# Altium PCB BatteryBoard.PcbDoc
Units mil, origin at the board's own origin, x right, y up, seen from the top; angles counter-clockwise.
Board outline 11220.47 x 6496.06 mil, 2 copper layers (Top Layer, Bottom Layer); 131 components, 81 nets, 466 pads, 32 vias.
Unrouted connection lines stored in the file: 96.
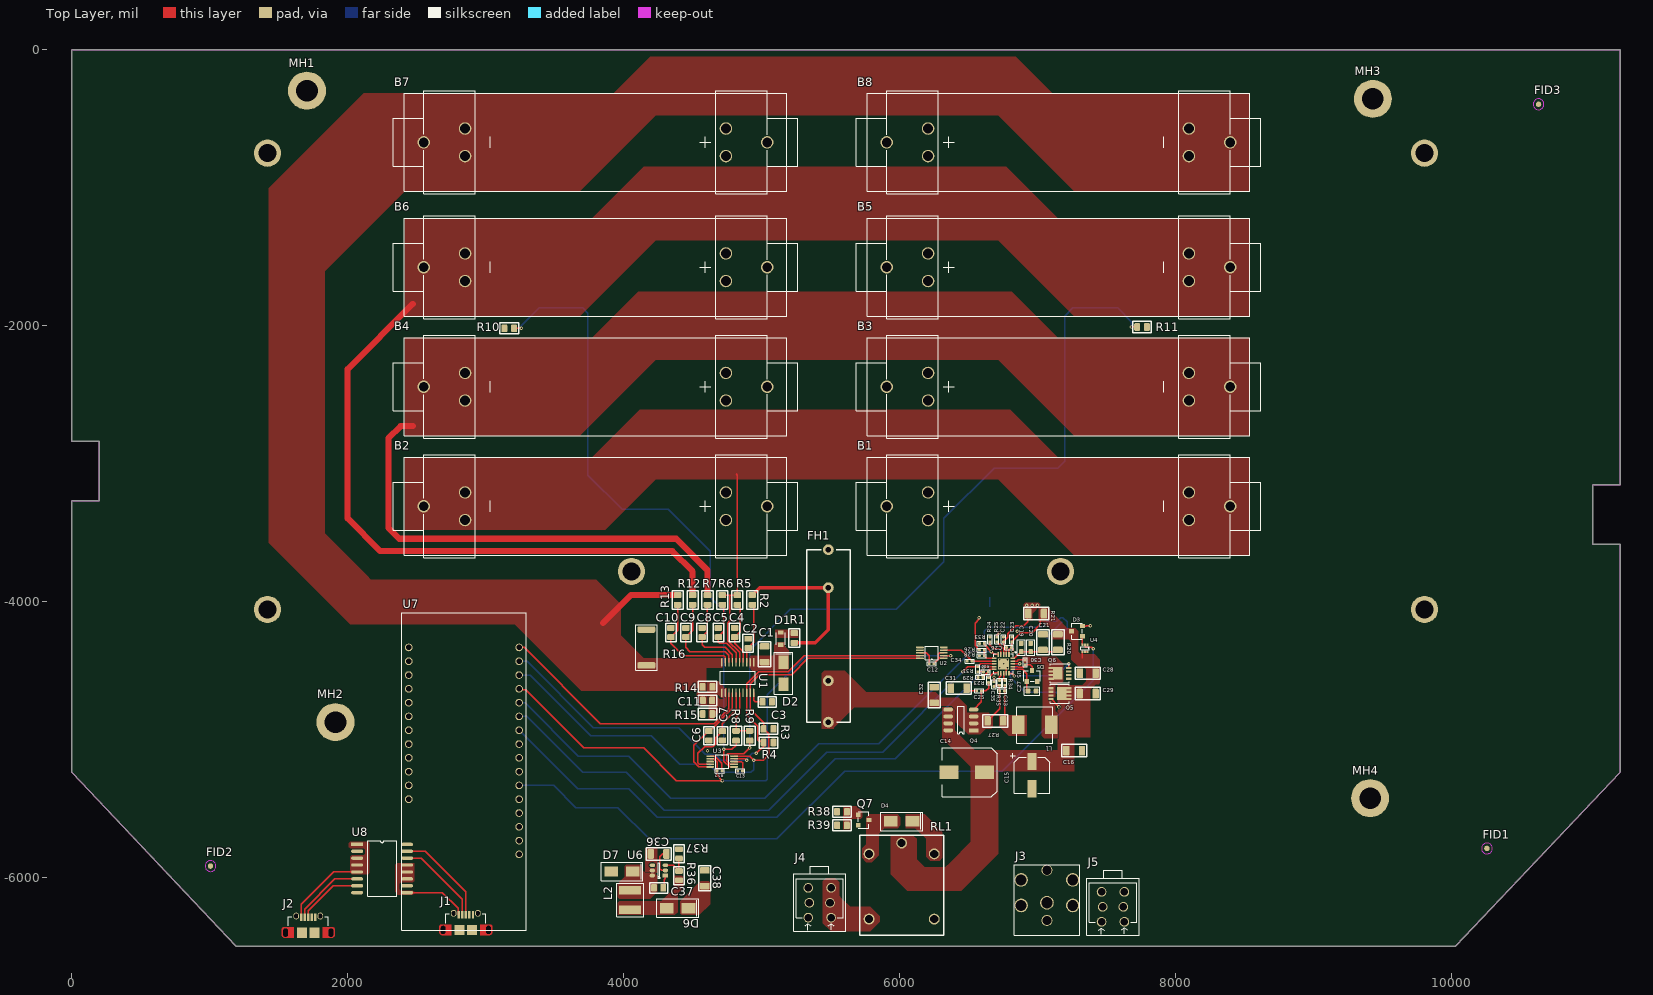
[diagram p0: Top Layer view]
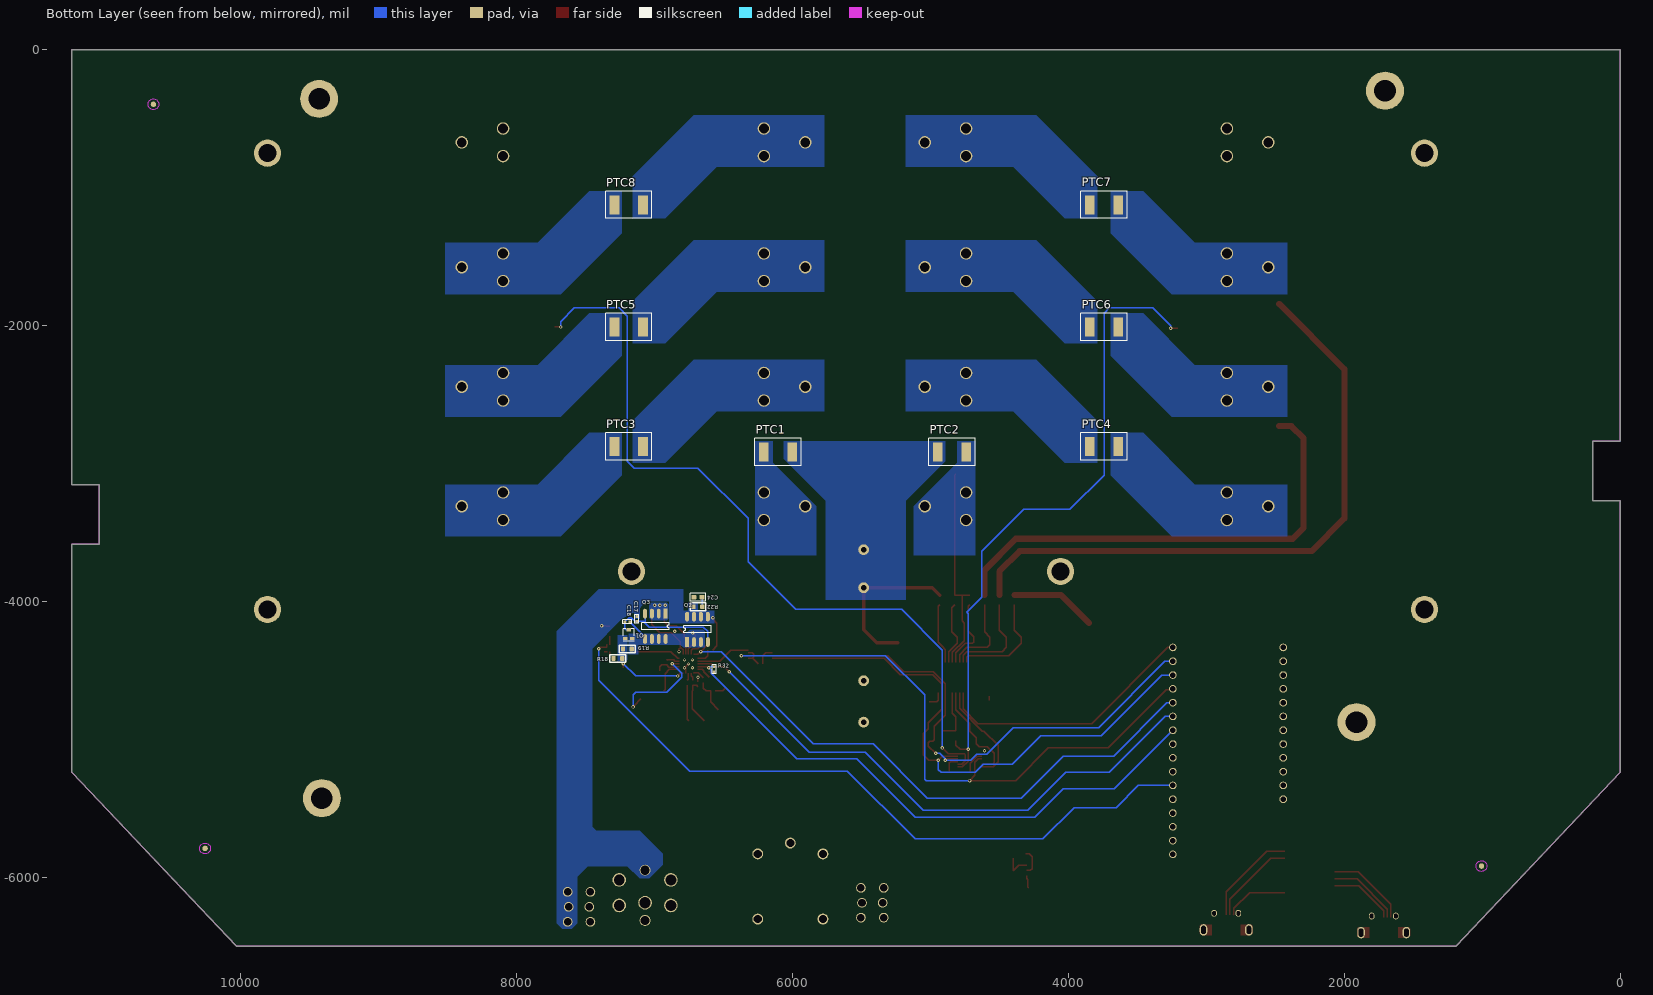
[diagram p1: Bottom Layer view, seen from below]
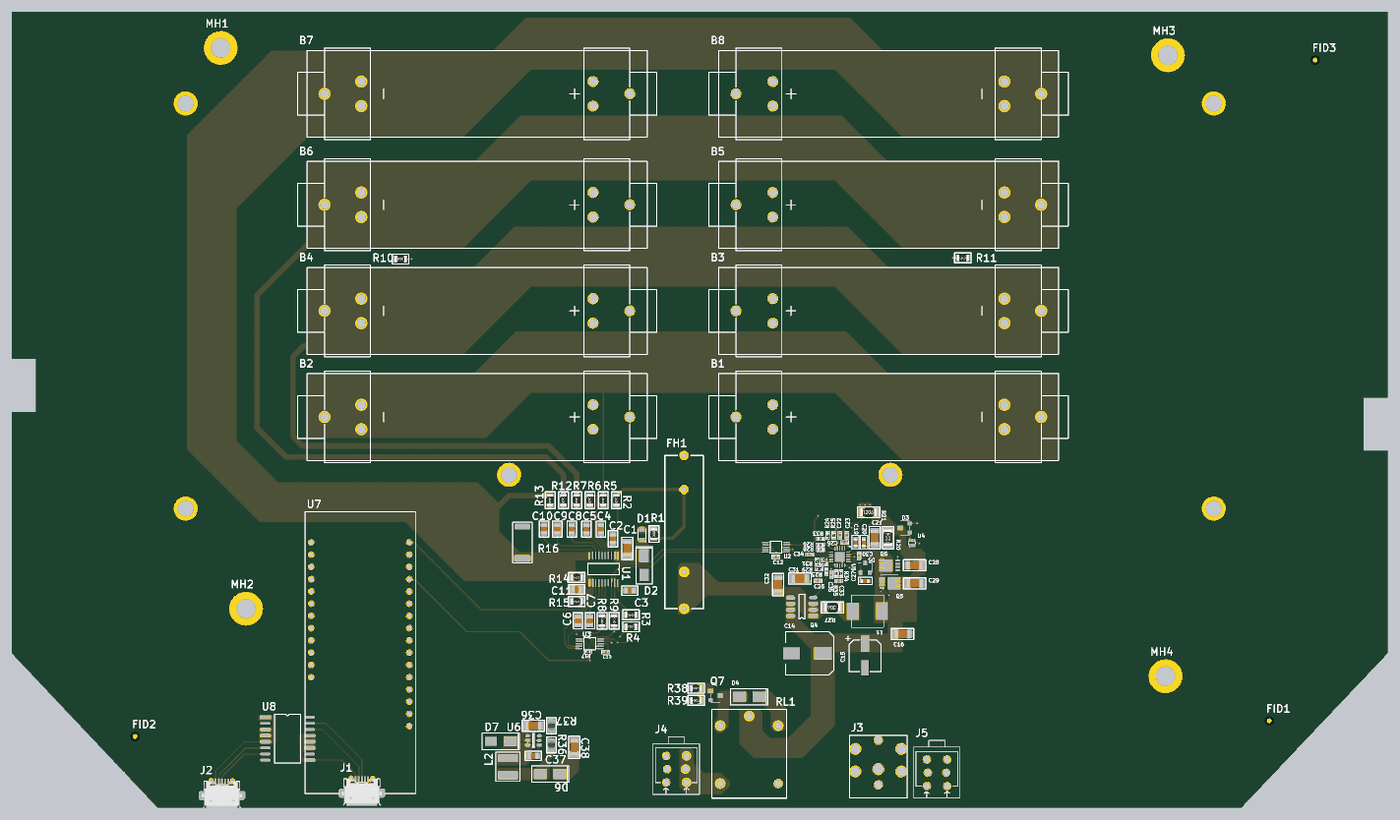
[diagram p2: 3D render of the assembled board from above, using the file's embedded part models]

## Layer stack, top to bottom
Top Solder: solder mask 0.4, Solder Resist, Dk 3.5
Top Layer: signal copper 1.4
Dielectric 1: dielectric 12.6, FR-4, Dk 4.8
Bottom Layer: signal copper 1.4
Bottom Solder: solder mask 0.4, Solder Resist, Dk 3.5

## Board outline
0,-5236.22 0,-3267.72 196.85,-3267.72 196.85,-2834.65 0,-2834.65 0,0 11220.47,0 11220.47,-3149.61 11023.62,-3149.61 11023.62,-3582.68 11220.47,-3582.68 11220.47,-5236.22 10027.56,-6496.06 1188.98,-6496.06

## Design rules (kind name [scope] priority, off if disabled: settings)
Clearance [All] p1: gap=6
ComponentClearance [All] p1: gap=0 collisioncheckmode=3 verticalgap=10 showdistances=FALSE
HoleToHoleClearance [All] p1: gap=3.94 allowstackedmicrovias=TRUE
MinimumSolderMaskSliver [All] p1: minsoldermaskwidth=0
PlaneConnect [All] p1: planeconnectstyle=Direct reliefexpansion=20 reliefentries=4 reliefconductorwidth=10 reliefairgap=10
PolygonConnect [All] p1: connectstyle=Direct reliefconductorwidth=10 reliefentries=4 polygonreliefangle="90 Angle" airgapwidth=10
RoutingVias [All] p1: holewidth=28 width=50 viastyle="Through Hole" minholewidth=11.81 minwidth=5.91 maxholewidth=248.03 maxwidth=50
SilkToSilkClearance [All] p1: silktosilkclearance=0
SilkToSolderMaskClearance [IsPad] p1: minsilkscreentomaskgap=0 clearancetoexposedcopper=TRUE
SolderMaskExpansion [All] p1: expansion=4
UnRoutedNet [All] p1 off:
Width [All] p1: maxlimit=50 minlimit=6 preferedwidth=10
23 further rules are at their usual default settings.

## Classes and differential pairs
component class Title: FID1 FID2 FID3 MH1 MH2 MH3 MH4
component class MC: J1 J2 J3 J4 J5 Q7 R38 R39 U7 U8
component class DC_DC_5V: C36 C37 C38 D6 D7 L2 R36 R37 U6
component class BatteryCharger: C14 C15 C16 C17 C18 C19 C20 C21 C22 C23 C24 C25 C26 C27 C28 C29 C30 C31 C32 C33 C34 C35 D3 D4 D5 L1 Q1 Q2 Q3 Q4 Q5 Q6 R18 R19 R20 R21 R22 R23 R24 R25 R26 R27 R28 R29 R30 R31 R32 R33 R34 R35 RL1 U4 U5
component class ADC: C12 C13 R17 U2 U3
component class "Battery Front End": B1 B2 B3 B4 B5 B6 B7 B8 C1 C2 C3 C4 C5 C6 C7 C8 C9 C10 C11 D1 D2 FH1 PTC1 PTC2 PTC3 PTC4 PTC5 PTC6 PTC7 PTC8 R1 R2 R3 R4 R5 R6 R7 R8 R9 R10 R11 R12 R13 R14 R15 R16 U1

## Components (designator, comment, footprint, x,y, rotation, side; value= is the part's Value field where it differs from the comment)
B1 "Battery Cell 18650" "18650 PC PIN" 5905.51,-3307.09 r0 top
B2 "Battery Cell 18650" "18650 PC PIN" 5039.37,-3307.09 r180 top
B3 "Battery Cell 18650" "18650 PC PIN" 5905.51,-2440.94 r0 top
B4 "Battery Cell 18650" "18650 PC PIN" 5039.37,-2440.94 r180 top
B5 "Battery Cell 18650" "18650 PC PIN" 5905.51,-1574.8 r0 top
B6 "Battery Cell 18650" "18650 PC PIN" 5039.37,-1574.8 r180 top
B7 "Battery Cell 18650" "18650 PC PIN" 5039.37,-669.29 r180 top
B8 "Battery Cell 18650" "18650 PC PIN" 5905.51,-669.29 r0 top
C1 "CAP - 1206" CAP_1206 5019.68,-4379.92 r90 top
C2 "CAP - 0805" CAP_0805 4901.57,-4301.18 r90 top
C3 "CAP - 0805" CAP_0805 5039.37,-4724.41 r0 top
C4 "CAP - 0805" CAP_0805 4803.15,-4222.44 r90 top
C5 "CAP - 0805" CAP_0805 4685.04,-4222.44 r90 top
C6 "CAP - 0805" CAP_0805 4616.14,-4970.47 r270 top
C7 "CAP - 0805" CAP_0805 4714.57,-4970.47 r270 top
C8 "CAP - 0805" CAP_0805 4566.93,-4222.44 r90 top
C9 "CAP - 0805" CAP_0805 4448.82,-4222.44 r90 top
C10 "CAP - 0805" CAP_0805 4340.55,-4222.44 r90 top
C11 "CAP - 0805" CAP_0805 4606.3,-4714.57 r0 top
C12 "CAP - 0402" CAP_0402 6230.31,-4448.82 r0 top
C13 "CAP - 0402" CAP_0402 4842.52,-5226.38 r180 top
C14 "CAP ALU - 6.3mm" "CAP UWT 8x10" 6486.22,-5236.22 r180 top
C15 "CAP ALU - 6.3mm" "CAP ALU - 6.3mm DIA" 6958.66,-5255.91 r90 top
C16 "CAP - 1206" CAP_1206 7263.78,-5078.74 r0 top
C17 "CAP - 0402" CAP_0402 7126.28,-4124.41 r90 bottom
C18 "CAP - 0402" CAP_0402 7195.18,-4144.09 r180 bottom
C19 "CAP - 0603" CAP_0603 6880.22,-4331.1 r90 top
C20 "CAP - 0603" CAP_0603 6949.11,-4331.1 r90 top
C21 "CAP - 1206" CAP_1206 7037.7,-4291.73 r90 top
C22 "CAP - 0402" CAP_0402 6752.26,-4272.05 r270 top
C23 "CAP - 0402" CAP_0402 6811.32,-4272.05 r270 top
C24 "CAP - 0603" CAP_0603 6683.07,-3966.54 r0 bottom
C25 "CAP - 0402" CAP_0402 6574.8,-4645.67 r180 top
C26 "CAP - 0402" CAP_0402 6791.63,-4331.1 r180 top
C27 "CAP - 0603" CAP_0603 6958.96,-4646.06 r0 top
C28 "CAP - 1206" CAP_1206 7362.2,-4517.72 r180 top
C29 "CAP - 1206" CAP_1206 7362.2,-4665.35 r0 top
C30 "CAP - 0402" CAP_0402 6909.74,-4439.37 r90 top
C31 "CAP - 1206" CAP_1206 6427.17,-4625.98 r180 top
C32 "CAP - 1206" CAP_1206 6250,-4675.2 r90 top
C33 "CAP - 0402" CAP_0402 6742.42,-4646.06 r0 top
C34 "CAP - 0402" CAP_0402 6506.2,-4429.53 r180 top
C35 "CAP - 0402" CAP_0402 6683.07,-4596.46 r270 top
C36 "CAP - 1206" CAP_1206 4251.97,-5826.77 r0 top
C37 "CAP - 0805" CAP_0805 4251.97,-6072.83 r180 top
C38 "CAP - 1206" CAP_1206 4586.61,-6003.94 r90 top
D1 "SCHOTTKEY" SOD-323 5137.8,-4222.44 r270 top
D2 "DIODE ZENER" DO-214AC_SOD128 5157.48,-4517.72 r270 top
D3 "BAT54C" BAT54C 7323.13,-4212.99 r90 top
D4 "SCHOTTKEY" DO-214AC_SOD128 6013.78,-5590.55 r180 top
D5 "DIODE BAT54" BAT54 6958.96,-4577.17 r0 top
D6 "SCHOTTKEY" DO-214AC_SOD128 4389.76,-6220.47 r180 top
D7 "SCHOTTKEY" DO-214AC_SOD128 3986.22,-5954.72 r180 top
FH1 "FH 3AB-3AG" FH_3AB_3AG 5482.28,-3622.05 r270 top
FID1 "Fiducial 1mm" FID_1MM 10255.91,-5787.4 r90 top
FID2 "Fiducial 1mm" FID_1MM 1003.94,-5915.35 r90 top
FID3 "Fiducial 1mm" FID_1MM 10629.92,-393.7 r90 top
J1 "629105150921" 629105150921 2854.33,-6377.95 r0 top
J2 "629105150921" 629105150921 1712.6,-6397.64 r0 top
J3 "Barrel 5.5x2.5mm" "Barrel 5.5mm 2.5mm" 7066.93,-6417.32 r90 top
J4 "MOLEX 4 POS - TERMINAL BLOCK 2 POS" MOLEX4POS_TERMBLOCK2POS 5501.97,-6289.37 r180 top
J5 "MOLEX 4 POS - TERMINAL BLOCK 2 POS" MOLEX4POS_TERMBLOCK2POS 7627.95,-6318.9 r180 top
L1 "IND" ASPI-0630LR 6978.35,-4891.73 r180 top
L2 "IND" NR5040T150M 4045.28,-6161.42 r270 top
MH1 "Mounting Hole 6/32" MH_ENG_6-32 1702.76,-295.28 r0 top
MH2 "Mounting Hole 6/32" MH_ENG_6-32 1909.45,-4872.05 r0 top
MH3 "Mounting Hole 6/32" MH_ENG_6-32 9429.13,-354.33 r0 top
MH4 "Mounting Hole 6/32" MH_ENG_6-32 9409.45,-5423.23 r0 top
PTC1 "PTC - 1812" "PTC - 1812" 6102.36,-2913.39 r0 bottom
PTC2 "PTC - 1812" "PTC - 1812" 4842.52,-2913.39 r180 bottom
PTC3 "PTC - 1812" "PTC - 1812" 7185.04,-2874.02 r180 bottom
PTC4 "PTC - 1812" "PTC - 1812" 3740.16,-2874.02 r0 bottom
PTC5 "PTC - 1812" "PTC - 1812" 7185.04,-2007.87 r180 bottom
PTC6 "PTC - 1812" "PTC - 1812" 3740.16,-2007.87 r0 bottom
PTC7 "PTC - 1812" "PTC - 1812" 3740.16,-1122.05 r0 bottom
PTC8 "PTC - 1812" "PTC - 1812" 7185.04,-1122.05 r180 bottom
Q1 "MOSFET-N" PG-SOT-323 7185.33,-4203.15 r180 bottom
Q2 "MOSFET-N" "SO-8 FDS6680AS" 6761.81,-4291.34 r90 bottom
Q3 "MOSFET-N" "SO-8 FDS6680AS" 6917.22,-4085.04 r270 bottom
Q4 "MOSFET-N" "SO-8 FDS6680AS" 6535.43,-4931.1 r180 top
Q5 "MOSFET-N" SiS412DN 7096.46,-4625.98 r0 top
Q6 "MOSFET-N" SiS412DN 7224.41,-4557.09 r180 top
Q7 "NMOS" SOT-23 5698.82,-5580.71 r270 top
R1 "RES - 0805" RES_0805 5236.22,-4261.81 r90 top
R2 "RES - 0805" RES_0805 4931.1,-3986.22 r270 top
R3 "RES - 0805" RES_0805 5049.21,-4921.26 r0 top
R4 "RES - 0805" RES_0805 5049.21,-5019.68 r0 top
R5 "RES - 0805" RES_0805 4822.83,-3986.22 r270 top
R6 "RES - 0805" RES_0805 4714.57,-3986.22 r270 top
R7 "RES - 0805" RES_0805 4606.3,-3986.22 r270 top
R8 "RES - 0805" RES_0805 4812.99,-4970.47 r90 top
R9 "RES - 0805" RES_0805 4911.42,-4970.47 r90 top
R10 "TH - 0805" RES_0805 3169.29,-2017.72 r180 top
R11 "TH - 0805" RES_0805 7755.91,-2007.87 r0 top
R12 "RES - 0805" RES_0805 4498.03,-3986.22 r270 top
R13 "RES - 0805" RES_0805 4389.76,-3986.22 r270 top
R14 "RES - 0805" RES_0805 4606.3,-4616.14 r0 top
R15 "RES - 0805" RES_0805 4606.3,-4812.99 r0 top
R16 "RES - 2512" RES_2512 4163.39,-4330.71 r90 top
R17 "RES - 0402" RES_0402 4694.88,-5226.38 r180 top
R18 "RES - 0603" RES_0603 7264.07,-4409.84 r180 bottom
R19 "RES - 0603" RES_0603 7195.18,-4340.94 r180 bottom
R20 "RES - 1206" RES_1206 7145.96,-4291.73 r90 top
R21 "RES - 1206" RES_1206 6988.19,-4084.65 r0 top
R22 "RES - 0603" RES_0603 6683.37,-4035.83 r180 bottom
R23 "RES - 0402" RES_0402 6644,-4567.32 r270 top
R24 "RES - 0402" RES_0402 6653.84,-4272.05 r270 top
R25 "RES - 0402" RES_0402 6703.05,-4272.05 r270 top
R26 "RES - 0402" RES_0402 6594.78,-4350.79 r0 top
R27 "RES - 1206" RES_1206 6692.91,-4862.2 r180 top
R28 "RES - 0402" RES_0402 6594.78,-4390.16 r180 top
R29 "RES - 0402" RES_0402 6584.94,-4547.64 r180 top
R30 "RES - 0402" RES_0402 6624.31,-4508.27 r180 top
R31 "RES - 0402" RES_0402 6565.26,-4488.58 r90 top
R32 "RES - 0402" RES_0402 6565.26,-4488.58 r90 bottom
R33 "RES - 0402" RES_0402 6594.78,-4301.57 r0 top
R34 "RES - 0402" RES_0402 6762.11,-4587.01 r270 top
R35 "RES - 0402" RES_0402 6722.74,-4587.01 r270 top
R36 "RES - 0805" FER_0805 4399.61,-5984.25 r90 top
R37 "RES - 0805" FER_0805 4399.61,-5826.77 r90 top
R38 "RES - 0805" RES_0805 5580.71,-5521.65 r0 top
R39 "RES - 0805" RES_0805 5580.71,-5620.08 r0 top
RL1 "Relay SPDT" ORWH-SH 5777.56,-5826.77 r270 top
U1 "BQ76925PWR" BQ76925 4940.94,-4438.98 r270 top
U2 "ADS1015" ADS1015 6318.9,-4409.45 r180 top
U3 "ADS1015" ADS1015 4625.98,-5118.11 r0 top
U4 "IMD2A" IMD2A 7362.2,-4311.02 r270 top
U5 "BQ24725A" bq24725A 6752.26,-4449.21 r270 top
U6 "RT8258" SOT23-6 4301.18,-5984.25 r180 top
U7 "ESP32" "ESP32 V1" 2440.94,-4330.71 r0 top
U8 "ADUM3160" SOIC16 2066.93,-5757.87 r0 top

## Footprints (in the part's own frame and the unit in brackets; to place one, negate y for a bottom-side part, rotate by r counter-clockwise, add the part's x,y. Pads: shape width x height; smd on the part's side, far side on the other; paste and mask are expansions set on the pad)
"18650 PC PIN" [mm]
  round 2.3 hole 1.83: 1(0,0) 1(7.62,-2.54) 1(7.62,2.54) 2(55.62,-2.54) 2(55.62,2.54) 2(63.24,0)
  silkscreen extent -5.6,-9.5 68.84,9.5
629105150921 [mm] "Micro USB 2.0 Type AB Horizontal"
  rect 0.4x1.35 smd: 1(-1.3,2.805) 2(-0.65,2.805) 3(0,2.805) 4(0.65,2.805) 5(1.3,2.805)
  round 0 / inner oval 1.4x2.1 / far side oval 1.4x2.1 hole 0.825 slot 1.5 at 90 deg: Shell(-4.175,0)
  oval 1.05x1.25 hole 0.65 slot 0.85 at 90 deg: Shell(-2.225,3.055) Shell(2.225,3.055)
  rect 1.8x1.9 smd: Shell(-1.15,0) Shell(1.15,0)
  round 0 / inner round 0 / far side oval 1.4x2.1 hole 0.825 slot 1.5 at 90 deg: Shell(4.175,0)
  Top Layer region: 4.353,-0.95 4.544,-0.912 4.706,-0.804 4.814,-0.641 4.852,-0.45 4.852,-0.45 4.852,0.65 4.83,0.765 4.765,0.862 4.667,0.927 4.553,0.95 4.553,0.95 2.668,0.95 2.668,-0.95
  Top Layer region: -4.353,-0.95 -4.544,-0.912 -4.706,-0.804 -4.814,-0.641 -4.852,-0.45 -4.852,-0.45 -4.852,0.65 -4.83,0.765 -4.765,0.862 -4.667,0.927 -4.553,0.95 -4.553,0.95 -2.668,0.95 -2.668,-0.95
  silkscreen extent -3.7,1.25 3.7,2.97, body extent -4.3,-2.64 4.3,3.23, height 2.76
ADS1015 [mm]
  rect 1.45x0.3 smd: 1(0,0)
  oval 1.45x0.3 smd: 2(0,-0.5) 3(0,-1) 4(0,-1.5) 5(0,-2) 6(4.4,-2) 7(4.4,-1.5) 8(4.4,-1) 9(4.4,-0.5) 10(4.4,0)
  silkscreen extent 1,-2.25 3.4,0.25
ASPI-0630LR [mm]
  rect 2.35x3.4 smd: 1(-3.025,0) 2(3.025,0)
  silkscreen extent -3.35,-3.35 3.35,3.35
"Barrel 5.5mm 2.5mm" [mm]
  round 2 hole 1.7: 1(12,0) 3(2.75,0)
  round 2.5 hole 2.1: 2(6,0)
  round 2.5 hole 2: 3(5.5,-4.75) 3(5.5,4.75) 3(10.2,-4.75) 3(10.2,4.75)
  silkscreen extent 0,-6 13,6
BAT54 [mm]
  rect 0.8x0.9 smd: 1(-0.95,0) 2(0.95,0) 3(0,2)
  silkscreen extent -1.5,0 1.5,1.97
BAT54C [mm]
  rect 0.8x0.9 smd: 1(0.95,0) 2(-0.95,0) 3(0,2)
  silkscreen extent -1.5,0 1.5,1.97
bq24725A [mm]
  rect 2.05x2.05 smd: 0(0,0)
  rect 0.85x0.28 smd: 1(-1.725,1) 2(-1.725,0.5) 3(-1.725,0) 4(-1.725,-0.5) 5(-1.725,-1) 11(1.725,-1) 12(1.725,-0.5) 13(1.725,0) 14(1.725,0.5) 15(1.725,1)
  rect 0.28x0.85 smd: 6(-1,-1.725) 7(-0.5,-1.725) 8(0,-1.725) 9(0.5,-1.725) 10(1,-1.725) 16(1,1.725) 17(0.5,1.725) 18(0,1.725) 19(-0.5,1.725) 20(-1,1.725)
  silkscreen extent -2.18,-1.83 1.83,2.23
BQ76925 [mm]
  rect 1.55x0.25 smd: 1(0,0)
  oval 1.55x0.25 smd: 2(0,-0.65) 3(0,-1.3) 4(0,-1.95) 5(0,-2.6) 6(0,-3.25) 7(0,-3.9) 8(0,-4.55) 9(0,-5.2) 10(0,-5.85) 11(5.6,-5.85) 12(5.6,-5.2) 13(5.6,-4.55) 14(5.6,-3.9) 15(5.6,-3.25) 16(5.6,-2.6) 17(5.6,-1.95) 18(5.6,-1.3) 19(5.6,-0.65) 20(5.6,0)
  silkscreen extent 1.61,-6.18 3.99,0.33
"CAP ALU - 6.3mm DIA" [mm]
  rect 3.2x1.6 smd: 1(2.5,0) 2(-2.5,0)
  silkscreen extent -3.3,-3.3 4.05,3.98
"CAP UWT 8x10" [mm]
  rect 3.5x2.5 smd: 1(-3.25,0) 2(3.25,0)
  silkscreen extent -5.55,-4.5 4.5,4.5
CAP_0402 [mil]
  rrect60% 20x20 smd: 1(-17.5,0) 2(17.5,0)
  silkscreen extent -32,-15 32,15, body extent -19,-10 20,10, height 20
CAP_0603 [mil]
  rrect35% 35x34 smd: 1(-29.5,0) 2(29.5,0)
  silkscreen extent -56,-30 56,30, body extent -32,-16 31,16, height 35
CAP_0805 [mil]
  rrect37% 43x55 smd: 1(-33.5,0) 2(33.5,0)
  silkscreen extent -66,-38 66,38, body extent -39,-24 40,25, height 49
CAP_1206 [mil]
  rrect34% 47x71 smd: 1(-57,0) 2(57,0)
  silkscreen extent -91,-45 91,45, body extent -62,-31 64,32, height 49
DO-214AC_SOD128 [mm] "In between DO-214AC and SOD128 diode package for easy diode change"
  rect 2.5x1.9 smd: 1(2,0) 2(-2,0)
  silkscreen extent -3.85,-1.7 3.85,1.7
"ESP32 V1" [mil]
  round 55 hole 40: 1(0,0) 2(0,-100) 3(0,-200) 4(0,-300) 5(0,-400) 6(0,-500) 7(0,-600) 8(0,-700) 9(0,-800) 10(0,-900) 11(0,-1000) 12(0,-1100) 13(800,0) 14(800,-100) 15(800,-200) 16(800,-300) 17(800,-400) 18(800,-500) 19(800,-600) 20(800,-700) 21(800,-800) 22(800,-900) 23(800,-1000) 24(800,-1100) 25(800,-1200) 26(800,-1300) 27(800,-1400) 28(800,-1500)
  silkscreen extent -50,-2050 850,250
FER_0805 [mil]
  rrect37% 43x55 smd: 1(-33.5,0) 2(33.5,0)
  silkscreen extent -66,-38 66,38, body extent -40,-25 38,25, height 33
FH_3AB_3AG [mm]
  round 2 hole 1: 1(0,0) 1(7,0) 2(24.13,0) 2(31.75,0)
  silkscreen extent 0,-4 31.75,4
FID_1MM [mm] "Fiducial 1mm diameter - Exposed 2mm"
  round 1 all layers, no hole paste-1 mask+0.5: 0(0,0)
  Keep-Out Layer circle w0.127: c0,0 r1
IMD2A [mm]
  rect 0.45x0.37 smd: 1(0,0) 2(0,-0.5) 3(0,-1) 4(1.25,-1) 5(1.25,-0.5) 6(1.25,0)
  silkscreen extent 0.33,-1.25 0.92,0.25
MH_ENG_6-32 [mm] "Mounting hole - Imperial 6-32"
  round 7 hole 4: 1(0,0)
MOLEX4POS_TERMBLOCK2POS [mm]
  round 1.78 hole 1.4: 1(0,0) 2(4.2,0) 3(0,-5.5) 4(4.2,-5.5) 5(0.195,-2.75) 6(4,-2.75)
  silkscreen extent -2.7,-9.45 6.9,2.5
NR5040T150M [mm]
  rect 1.5x4 smd: 1(-1.8,0) 2(1.8,0)
  silkscreen extent -3.05,-2.5 3.05,2.5
ORWH-SH [mm]
  round 2 hole 1.5: 1(0,12) 2(-2,6) 3(0,0) 4(12,0) 5(12,12)
  silkscreen extent -3.4,-1.75 15,13.75
PG-SOT-323 [mm]
  rect 0.8x0.6 smd: 1(-0.65,-1.6) 2(0.65,-1.6) 3(0,0)
  silkscreen extent -1,-2.07 1,0.18
"PTC - 1812" [mm]
  rect 1.78x3.5 smd: 1(-2.615,0) 2(2.615,0)
  silkscreen extent -4.25,-2.5 4.26,2.5
RES_0402 [mil]
  rrect60% 20x20 smd: 1(-17.5,0) 2(17.5,0)
  silkscreen extent -32,-15 32,15, body extent -23,-11 23,11, height 16
RES_0603 [mil]
  rrect39% 31x35 smd: 1(-31.5,0) 2(31.5,0)
  silkscreen extent -58,-28 57,28, body extent -33,-16 33,16, height 22
RES_0805 [mil]
  rrect37% 43x55 smd: 1(-35.5,0) 2(35.5,0)
  silkscreen extent -68,-40 68,40, body extent -45,-27 45,27, height 30
RES_1206 [mil]
  rrect34% 47x71 smd: 1(-57,0) 2(57,0)
  silkscreen extent -91,-45 91,45, body extent -66,-34 66,34, height 33
RES_2512 [mm]
  rrect50% 1.2x3.3 smd: 1(-3.3,0) 2(3.3,0)
  silkscreen extent -4.2,-2 4.2,2
SiS412DN [mm]
  rect 1.725x2.35 smd: 1(1.993,-0.99)
  rect 0.99x0.405 smd: 1(3.237,-1.98) 1(3.237,-1.32) 1(3.237,-0.66) 1(3.237,0) 2(0,-1.98) 3(0,-1.32) 3(0,-0.66) 3(0,0)
  silkscreen extent -0.13,-2.74 3.37,0.76
"SO-8 FDS6680AS" [mm]
  oval 1.78x0.72 smd: 1(4.68,-3.81) 1(4.68,-2.54) 1(4.68,-1.27) 1(4.68,0) 2(0,-3.81) 3(0,-2.54) 3(0,-1.27)
  rect 1.78x0.72 smd: 3(0,0)
  silkscreen extent 1.72,-4.44 2.96,0.63
SOD-323 [mm]
  rect 0.8x1 smd: 1(0,0) 2(2.225,0)
  silkscreen extent 0,-0.8 2.62,0.83
SOIC16 [mm]
  rect 2.2x0.6 smd: 1(0,0)
  oval 2.2x0.6 smd: 2(0,-1.27) 3(0,-2.54) 4(0,-3.81) 5(0,-5.08) 6(0,-6.35) 7(0,-7.62) 8(0,-8.89) 9(9.2,-8.89) 10(9.2,-7.62) 11(9.2,-6.35) 12(9.2,-5.08) 13(9.2,-3.81) 14(9.2,-2.54) 15(9.2,-1.27) 16(9.2,0)
  silkscreen extent 1.93,-9.53 7.26,0.64
SOT23-6 [mm]
  rect 1x0.7 smd: 1(0,0)
  oval 1x0.7 smd: 2(0,-0.95) 3(0,-1.9) 4(2.4,-1.9) 5(2.4,-0.95) 6(2.4,0)
  silkscreen extent 0.96,-2.38 1.44,0.48
SOT-23 [mm]
  rect 0.8x0.9 smd: 1(0.95,0) 2(-0.95,0) 3(0,2)
  silkscreen extent -1.5,0 1.5,1.97

## Part data
C14 C15: library part "CAP ALU - 6_3mm"
FH1: "Fuse holder (3AB-3AG)"
FID1 FID2 FID3: library part "FID - 1MM", "FID - 1MM"
J1 J2: "Micro USB 2.0 Type AB Receptacle WR-COM, Horizontal, SMT"
J3: "Jack 5.5x2.5mm"
MH1 MH2 MH3 MH4: library part "MH - 6-32"
Q1 Q2 Q3 Q4 Q5 Q6: "N-Channel MOSFET"
U4: "Dual digital Transistor"

## Free pads (board coordinates)
  round 196.85 hole 129.92: 0(1417.32,-4055.12) 0(1417.32,-748.03) 0(4055.12,-3779.53) 0(7165.35,-3779.53) 0(9803.15,-4055.12) 0(9803.15,-748.03)

## Via types
v1: diameter 25, hole 12, Top Layer to Bottom Layer, tented top, 27 vias
v2: diameter 22, hole 11, Top Layer to Bottom Layer, tented top, 5 vias

## Nets (pads, with @x,y where several pads share a name; then routed paths per layer and width w, separated by ;. In a path a pad name is that pad's centre, name@x,y a point inside that pad or via, vN(x,y) a via of type N, cw(c..) or ccw(c..) an arc to the next point about the centre after c; other vN are vias at no path point)
5V_INTERNAL: U7.10
5V_REG: C38.1 D4.2 D6.2 J1.1 RL1.1 U8.9 U8.11 U8.12 U8.13 | length 464.5
  Top Layer w10: U8.9 2685.02,-6107.87 2799.46,-6222.31 2799.46,-6263.83 J1.1
+BATT: C25.2 C31.1 C32.1 C33.1 C35.2 C36.1 FH1.2 Q4.3 R27.2 R35.2 U6.5 | length 420.3
  Top Layer w10: C31.1 6503.85,-4645.67 C25.2 ; R27.2 6724.92,-4773.2 C33.1 6722.74,-4643.88 R35.2 6692.52,-4604.51 C35.2
-BATT: B7.2 B8.2 R13.1 R14.1 R16.1 U1.10 | length 625.4
  Top Layer w45: 3848.43,-4153.54 4051.25,-3950.72 R13.1
BQ_ACOK: R33.2 U5.5 U7.17 | length 4287.7
  Top Layer w10: R33.2 6612.28,-4309.13 v1(6663.39,-4360.24) 6684.45,-4381.3 U5.5
  Bottom Layer w10: U7.17 3283.86,-4730.71 3671.26,-5118.11 4035.43,-5118.11 4340.55,-5423.23 5019.68,-5423.23 5413.39,-5029.53 5846.46,-5029.53 6515.75,-4360.24 v1(6663.39,-4360.24)
BQ_SCL: R32.2 U5.9 U7.19 | length 4211.1
  Top Layer w10: v1(6604.33,-4478.35) 6610.61,-4472.07 6681.18,-4472.07 U5.9
  Bottom Layer w10: U7.19 3664.57,-5354.33 4035.43,-5354.33 4242.13,-5561.02 5108.27,-5561.02 5531.5,-5137.8 5965.58,-5137.8 6152.59,-4950.79 6586.26,-4517.12 6586.26,-4496.42 v1(6604.33,-4478.35) 6597.07,-4471.08 R32.2
BQ_SDA: R31.2 U5.8 U7.18 | length 4165.7
  Top Layer w10: v1(6456.69,-4507.87) 6493.48,-4471.08 R31.2 6587.13,-4449.21 U5.8
  Bottom Layer w10: U7.18 3295.28,-4830.71 3700.79,-5236.22 4015.75,-5236.22 4291.34,-5511.81 5049.21,-5511.81 5472.44,-5088.58 5875.98,-5088.58 v1(6456.69,-4507.87)
GND: C1.2 C2.2 C3.2 C4.2 C5.2 C6.2 C7.2 C8.2 C9.2 C10.2 C12.2 C13.2 C14.2 C15.2 C16.2 C19.2 C20.2 C21.2 C22.1 C23.1 C24.2 C27.2 C28.2 C29.2 C31.2 C32.2 C34.2 C35.1 C36.2 C38.2 D2.1 D7.1 J1.5 J1.Shell J3.2 J3.3 J4.2 J4.4 J4.6 J5.2 J5.4 J5.6 MH1.1 MH2.1 MH3.1 MH4.1 Q6.3 Q7.1 R10.2 R11.2 R15.1 R16.2 R18.1 R28.2 R29.2 R37.2 R39.1 U2.1 U2.3 U3.3 U4.1 U5.0 U5.14 U6.2 U7.25 U8.10 U8.16 | length 459.6
  Top Layer w10: U6.2 4273.62,-5946.85 4261.81,-5935.04 4261.81,-5846.46 4281.5,-5826.77 C36.2 ; C12.2 6287.19,-4409.45 ; U2.1 6287.19,-4409.45 ; U2.3 6289.37,-4370.08 6279.53,-4379.92 6279.53,-4381.08 6279.35,-4381.25 6279.35,-4396.77 6287.19,-4404.6 6287.19,-4409.45 ; C35.1 v1(6683.07,-4547.24) ; v2(6752.26,-4449.21) 6771.95,-4468.9 U5.14
  other v1: 4606.3,-5078.74
  other v2: 6723.72,-4477.76 6780.81,-4477.76 6723.72,-4420.67 6780.81,-4420.67
IOUT: C34.1 U2.4 U5.7 | length 398.2
  Top Layer w10: U2.4 6444.57,-4350.39 C34.1 U5.7
NetB1_1: B1.1 PTC1.2
NetB1_2: B1.2 B2.2 PTC3.1 PTC4.1 R5.1 R6.1 U1.5 | length 1521.6
  Top Layer w10: R6.1 4768.7,-3950.72 ; 4812.99,-3070.87 4822.83,-3080.71 R5.1 4768.7,-3950.72 ; U1.5 4838.58,-4366.14 4753.94,-4281.5 4753.94,-4153.54 4768.7,-4138.78 4768.7,-3950.72
NetB2_1: B2.1 PTC2.2
NetB3_1: B3.1 PTC3.2
NetB3_2: B3.2 B4.2 PTC5.1 PTC6.1 R7.1 | length 3483.9
  Top Layer w45: 2470.47,-2726.38 2381.89,-2726.38 2293.31,-2814.96 2293.31,-3464.57 2372.05,-3543.31 4379.92,-3543.31 4606.3,-3769.68 R7.1
NetB4_1: B4.1 PTC4.2
NetB5_1: B5.1 PTC5.2
NetB5_2: B5.2 B6.2 PTC7.1 PTC8.1 R12.1 | length 4581
  Top Layer w45: 2470.47,-1840.55 1998.03,-2312.99 1998.03,-3395.67 2234.25,-3631.89 4350.39,-3631.89 4498.03,-3779.53 R12.1
NetB6_1: B6.1 PTC6.2
NetB7_1: B7.1 PTC7.2
NetB8_1: B8.1 PTC8.2
NetC1_1: C1.1 D1.2 D2.2 U1.1 U1.2
NetC2_1: C2.1 R2.2 U1.3 | length 442.5
  Top Layer w10: U1.3 4889.76,-4346.49 C2.1 4901.57,-4331.57 4940.94,-4292.2 4940.94,-4031.56 R2.2
NetC3_1: C3.1 U1.20 | length 124.1
  Top Layer w10: U1.20 4940.94,-4714.57 4950.79,-4724.41 C3.1
NetC4_1: C4.1 R5.2 U1.4 | length 467
  Top Layer w10: R5.2 4842.52,-4041.41 4842.52,-4216.57 C4.1 4803.15,-4301.18 4864.17,-4362.2 U1.4
NetC5_1: C5.1 R6.2 U1.6 | length 519.5
  Top Layer w10: R6.2 4724.41,-4031.56 4724.41,-4213.46 4685.04,-4252.83 C5.1 4685.04,-4291.34 4694.88,-4301.18 4744.09,-4301.18 4812.99,-4370.08 U1.6
NetC6_1: C6.1 U1.14 U3.5 | length 757.4
  Top Layer w10: U3.5 4623.2,-5194.07 4541.52,-5194.07 4507.87,-5160.42 4507.87,-5039.37 4610.27,-4936.97 C6.1 4623.06,-4936.97 4787.4,-4772.63 U1.14
NetC7_1: C7.1 U1.15 U3.4 | length 749.3
  Top Layer w10: U3.4 4547.24,-5177.17 4537.4,-5167.32 4537.4,-5098.43 4586.61,-5049.21 4645.67,-5049.21 4665.35,-5029.53 4665.35,-4986.18 C7.1 4714.57,-4881.89 4812.99,-4783.46 U1.15
NetC8_1: C8.1 R7.2 U1.7 | length 611.4
  Top Layer w10: R7.2 4606.3,-4216.57 C8.1 4566.93,-4311.02 4586.61,-4330.71 4734.25,-4330.71 4787.4,-4383.86 U1.7
NetC9_1: C9.1 R12.2 U1.8 | length 717.2
  Top Layer w10: R12.2 4498.03,-4206.73 C9.1 4448.82,-4330.71 4478.35,-4360.24 4734.25,-4360.24 4761.81,-4387.79 U1.8
NetC10_1: C10.1 R13.2 U1.9 | length 774.5
  Top Layer w10: R13.2 4389.76,-4206.73 C10.1 4340.55,-4301.18 4429.13,-4389.76 4724.41,-4389.76 4736.22,-4401.57 U1.9
NetC11_1: C11.1 R14.2 U1.11 | length 29.4
  Top Layer w10: C11.1 4572.8,-4685.14
NetC11_2: C11.2 R15.2 U1.12
NetC14_1: C14.1 C15.1 C16.1 C23.2 C26.1 C28.1 C29.1 D3.3 Q4.1 Q5.1 R20.2 R21.2 RL1.2 U4.4 U5.1 | length 481.1
  Top Layer w10: U5.1 6791.63,-4348.6 C26.1 ; v1(6820.87,-4360.24) 6820.87,-4342.83 C26.1 ; 7017.72,-4124.02 7017.72,-4163.39 6958.66,-4222.44 6878.43,-4222.44 C23.2 6811.32,-4328.92 C26.1 ; 7322.83,-4409.45 U4.4
NetC17_1: C17.1 C18.1 Q1.3 Q2.2 Q3.2 R24.1 | length 881.5
  Bottom Layer w10: Q2.2 6611.81,-4214.96 6643.7,-4183.07 7037.4,-4183.07 7066.93,-4153.54 ; Q3.2 7066.93,-4085.33 7066.93,-4153.54 ; Q1.3 7204.33,-4203.15 7212.68,-4194.8 C18.1 7182.76,-4114.17 7165.35,-4114.17 7137.62,-4141.91 C17.1 7078.56,-4141.91 7066.93,-4153.54
NetC18_2: C18.2 Q1.2 Q2.3 Q3.1 R19.2 R25.1 | length 211.1
  Top Layer w10: R25.1 6703.05,-4241.83 v1(6722.44,-4222.44)
  Bottom Layer w10: Q3.1@7067.22,-4269.29 7067.22,-4254.55 C18.2
NetC19_1: C19.1 C20.1 C21.1 R20.1 U5.20 | length 351.1
  Top Layer w10: U5.20 6830.98,-4409.84 C19.1 C20.1 7134.09,-4360.6 R20.1
NetC22_2: C22.2 C26.2 Q3.3 R21.1 U5.2 | length 417
  Top Layer w10: U5.2 6771.95,-4333.29 C26.2 6752.26,-4309.23 C22.2 6752.26,-4283.67 6760.39,-4275.55 6763.31,-4275.55 6781.5,-4257.36 6781.5,-4232.28 6840.55,-4173.23 6899.61,-4173.23 6929.13,-4143.7 6929.13,-4086.7 R21.1
  other v1: 6919.29,-4025.59 6958.66,-4025.59 6998.03,-4025.59
NetC24_1: C24.1 R22.2 | length 70
  Bottom Layer w10: R22.2 6653.57,-4034.12 C24.1
NetC25_1: C25.1 Q4.2 R23.2 | length 259.8
  Top Layer w10: Q4.2 6592.3,-4724.23 C25.1 6624.02,-4645.67 6644,-4625.69 R23.2
NetC27_1: C27.1 D5.1 U5.16 | length 243.7
  Top Layer w10: U5.16 6890.16,-4488.58 6921.56,-4519.98 D5.1 6921.56,-4638.16 C27.1
NetC30_1: C30.1 D5.3 U5.17 | length 181.2
  Top Layer w10: U5.17 6856.92,-4468.9 6860.34,-4472.32 6894.3,-4472.32 C30.1 6947.03,-4456.87 6958.96,-4468.8 D5.3
NetC30_2: C30.2 L1.1 Q5.3 Q6.1 U5.19 | length 94.9
  Top Layer w10: U5.19 6850,-4429.53 6860.24,-4419.29 6907.17,-4419.29 C30.2
NetC33_2: C33.2 L1.2 R27.1 R34.2 | length 262.7
  Top Layer w10: R27.1 6759.92,-4852.2 C33.2 6762.11,-4643.88 R34.2
NetC37_1: C37.1 U6.1 | length 95.1
  Top Layer w10: C37.1 4291.34,-6066.96 4291.34,-6013.78 4301.18,-6003.94 U6.1
NetC37_2: C37.2 D7.2 L2.1 U6.6
NetD1_1: D1.1 R1.2
NetD3_2: D3.2 U4.3 | length 61
  Top Layer w10: U4.3@7323.13,-4311.42 D3.2
NetD4_1: D4.1 Q7.3 RL1.3
NetD6_1: D6.1 L2.2 R36.1
NetFH1_1: FH1.1 PTC1.1 PTC2.1 R1.1 R2.1 | length 1163.5
  Top Layer w25: R2.1 4984.18,-3897.64 5482.28,-3897.64 5482.28,-4202.76 5387.73,-4297.31 R1.1
NetJ1_2: J1.2 U8.14 | length 634.9
  Top Layer w10: U8.14 2531.1,-5857.87 2828.74,-6155.51 J1.2
NetJ1_3: J1.3 U8.15 | length 712.3
  Top Layer w10: U8.15 2559.84,-5807.87 2854.33,-6102.36 J1.3
NetJ2_2: J2.2 U8.6 | length 531.3
  Top Layer w10: J2.2 1687.01,-6226.38 1905.51,-6007.87 U8.6
NetJ2_3: J2.3 U8.7 | length 476.9
  Top Layer w10: J2.3 1712.6,-6240.16 1894.88,-6057.87 U8.7
NetQ1_1: Q1.1 R18.2 R19.1
NetQ5_2: Q5.2 U5.18 | length 740.6
  Top Layer w10: U5.18 6869.68,-4449.21 v1(6870.08,-4448.82) ; Q5.2 7145.67,-4753.15 v1@7145.67,-4753.94
  Bottom Layer w10: v1(6870.08,-4448.82) 6801.18,-4517.72 6801.18,-4547.24 6909.45,-4655.51 7135.83,-4655.51 7153.6,-4673.28 v1(7153.6,-4761.87)
NetQ6_2: Q6.2 U5.15 | length 508.2
  Top Layer w10: U5.15 6810.43,-4517.13 v1(6830.71,-4537.4) ; Q6.2 v1(7224.41,-4448.82)
  Bottom Layer w10: v1(6830.71,-4537.4) 7135.83,-4537.4 v1(7224.41,-4448.82)
NetQ7_2: Q7.2 R38.2 R39.2
NetR8_1: R8.1 R10.1 U3.6 | length 4707.9
  Top Layer w10: R10.1 v1(3257.87,-2017.72) ; U3.6 4766.72,-5196.85 4724.41,-5154.54 v1(4724.41,-5068.9) 4783.46,-5068.9 4812.99,-5039.37 R8.1
  Bottom Layer w10: v1(3257.87,-2017.72) 3257.87,-1998.03 3385.83,-1870.08 3700.79,-1870.08 3740.16,-1909.45 3740.16,-3080.71 3988.68,-3329.23 4323.33,-3329.23 4625.98,-3631.89 4625.98,-3966.54 4734.25,-4074.8 4724.41,-4084.65 v1(4724.41,-5068.9)
NetR8_2: R8.2 R9.2 U1.16 | length 384.5
  Top Layer w10: U1.16 4838.58,-4807.09 4812.99,-4832.68 R8.2 R9.2
NetR9_1: R9.1 R11.1 U3.7 | length 5776.4
  Top Layer w10: U3.7 4769.66,-5177.17 4744.09,-5151.6 4744.09,-5108.27 4751.16,-5101.2 4869.27,-5101.2 v1(4911.42,-5059.06) R9.1 ; v1(7677.17,-2007.87) R11.1
  Bottom Layer w10: v1(4911.42,-5059.06) 4911.42,-4350.39 5206.69,-4055.12 5974.41,-4055.12 6318.9,-3710.63 6318.9,-3395.67 6683.07,-3031.5 7145.67,-3031.5 7194.88,-2982.28 7194.88,-1929.13 7253.94,-1870.08 7578.74,-1870.08 7677.17,-1968.5 v1(7677.17,-2007.87)
NetR17_2: R17.2 U2.2 U3.2 U7.16 | length 4394.7
  Top Layer w10: U7.16@3248.03,-4635.83 3287.4,-4635.83 3710.63,-5059.06 4143.7,-5059.06 4379.92,-5295.28 v1(4714.57,-5295.28) 4677.38,-5258.09 R17.2 ; U3.2 4652.84,-5137.8 4677.38,-5162.33 R17.2@4677.38,-5236.22 ; U2.2 v1(6368.11,-4389.76)
  Bottom Layer w10: v1(4714.57,-5295.28) 5029.53,-5295.28 5039.37,-5285.43 5039.37,-4675.2 5324.8,-4389.76 v1(6368.11,-4389.76)
NetR23_1: R23.1 U5.11 | length 87.7
  Top Layer w10: R23.1 6680.39,-4513.43 6712.89,-4513.43 U5.11
NetR24_2: R24.2 U5.4 | length 147.7
  Top Layer w10: R24.2 6653.54,-4289.84 6653.54,-4311.02 6683.07,-4340.55 6722.44,-4340.55 6732.58,-4350.69 U5.4
NetR25_2: R25.2 U5.3 | length 112.1
  Top Layer w10: R25.2 6752.26,-4338.76 U5.3
NetR26_2: R26.2 R28.1 U5.6 | length 119.6
  Top Layer w10: R26.2 R28.1 6631.97,-4409.84 U5.6
NetR29_1: R29.1 R30.1 U5.10 | length 111.3
  Top Layer w10: R29.1 R30.1 6641.81,-4499.92 6653.15,-4488.58 U5.10
NetR34_1: R34.1 U5.13 | length 56.5
  Top Layer w10: U5.13 6752.26,-4559.67 R34.1
NetR35_1: R35.1 U5.12 | length 56.7
  Top Layer w10: R35.1 6722.44,-4569.21 6722.44,-4547.24 6732.58,-4537.11 U5.12
NetR36_2: R36.2 R37.1 U6.3 | length 206
  Top Layer w10: U6.3 4358.3,-5909.45 R36.2 R37.1
NetR38_1: R38.1 U7.24
NetU1_13: U1.13 U7.13 | length 1909.3
  Top Layer w10: U7.13 3277.56,-4330.71 3828.74,-4881.89 4655.51,-4881.89 4761.81,-4775.59 U1.13
NetU4_2: U4.2 U7.23 | length 5107.6
  Top Layer w10: U4.2 7343.92,-4311.02 7343.92,-4330.88 7391.91,-4330.88 v1(7401.57,-4340.55)
  Bottom Layer w10: U7.23 3490.16,-5330.71 3651.57,-5492.13 3956.69,-5492.13 4183.07,-5718.5 5108.27,-5718.5 5600.39,-5226.38 6742.13,-5226.38 7401.57,-4566.93 v1(7401.57,-4340.55)
NetU4_5: U4.5 U4.6 | length 19.7
  Top Layer w10: U4.5 U4.6
POWERIN: C17.2 D3.1 J3.1 J5.1 J5.3 J5.5 Q2.1 R22.1 R26.1 | length 321.8
  Top Layer w10: v1(6574.8,-4114.17) 6574.8,-4124.02 6545.28,-4153.54 6545.28,-4318.78 R26.1 ; D3.1 7350,-4175.59 7352.36,-4173.23 v1(7381.89,-4173.23)
SCL: R3.1 U1.19 U2.10 U3.10 U7.15 | length 4225.2
  Top Layer w10: U3.10 4911.42,-5118.11 v1(4940.94,-5147.64) 5009.84,-5147.64 5049.21,-5108.27 5049.21,-4956.76 R3.1 5013.71,-4875.92 4915.35,-4777.56 U1.19 4915.35,-4592.52 4980.31,-4527.56 5216.54,-4527.56 5334.65,-4409.45 U2.10
  Bottom Layer w10: U7.15 3320.08,-4530.71 3759.84,-4970.47 4197.83,-4970.47 4404.53,-5177.17 4616.14,-5177.17 4675.2,-5236.22 4921.26,-5236.22 4940.94,-5216.54 v1(4940.94,-5147.64)
SDA: R4.1 U1.18 U2.9 U3.9 U7.14 | length 4070.6
  Top Layer w10: U3.9 4881.89,-5137.8 v1(4891.73,-5147.64) ; v1(4960.63,-5098.43) 5013.71,-5045.34 R4.1 5003.87,-5009.84 4980.31,-5009.84 4970.47,-5000 4970.47,-4901.57 4889.76,-4820.87 U1.18 4891.73,-4657.48 4891.73,-4593.51 4977.37,-4507.87 5190.75,-4507.87 5308.86,-4389.76 U2.9
  Bottom Layer w10: U7.14 3298.82,-4430.71 3779.53,-4911.42 4396.69,-4911.42 4589.53,-5104.25 4661.34,-5104.25 4704.72,-5147.64 v1(4891.73,-5147.64) 4891.73,-5137.8 4931.1,-5098.43 v1(4960.63,-5098.43)
SGND: J2.5 J2.Shell U8.2 U8.8
V3.3: C12.1 C13.1 R3.2 R4.2 R17.1 R30.2 R31.1 R32.1 R33.1 U2.8 U3.1 U3.8 U7.27 | length 464.1
  Top Layer w10: U3.1 4628.76,-5120.89 4658.57,-5120.89 4708.41,-5170.73 4708.41,-5193.64 4710.75,-5195.98 4710.75,-5226.38 R17.1 ; U3.8 4852.36,-5157.48 4862.2,-5167.32 C13.1@4862.2,-5226.38 ; U2.8 6190.94,-4370.08 6212.81,-4391.95 C12.1 ; R31.1 6604.63,-4506.08 R30.2
VBATT: J4.1 J4.3 J4.5 RL1.4
VUSB_JETSON: J2.1 U8.1 U8.3 U8.4 U8.5 | length 597.2
  Top Layer w10: J2.1 1661.42,-6192.91 1896.46,-5957.87 U8.5
pads on no net: D5.2 FID1.0 FID2.0 FID3.0 J1.4 J2.4 RL1.5 U1.17 U2.5 U2.6 U2.7 U6.4 U7.1 U7.2 U7.3 U7.4 U7.5 U7.6 U7.7 U7.8 U7.9 U7.11 U7.12 U7.20 U7.21 U7.22 U7.26 U7.28
copper on no net:
  other v1: 6850.39,-4212.6

## Polygon pours and split planes (outlines as drawn)
NetQ1_1 on Bottom Layer "Bottom Layer-No Net" (solid, pour order 96): 7194.88,-4242.13 7194.88,-4419.29 7204.72,-4429.13 7263.78,-4429.13 7263.78,-4389.76 7263.78,-4242.13
NetC22_2 on Bottom Layer "Bottom Layer-No Net" (solid, pour order 86): 7037.4,-4055.12 7037.4,-4005.91 6988.19,-4005.91 6938.98,-4005.91 6909.45,-4005.91 6899.61,-4015.75 6899.61,-4124.02 6909.45,-4133.86 7017.72,-4133.86 7037.4,-4114.17
NetC18_2 on Bottom Layer "Bottom Layer-No Net" (solid, pour order 84): 6633.86,-4212.6 6643.7,-4202.76 6742.13,-4202.76 6771.65,-4232.28 7185.04,-4232.28 7185.04,-4311.02 7185.04,-4379.92 7116.14,-4379.92 7116.14,-4311.02 6811.02,-4311.02 6791.34,-4330.71 6633.86,-4330.71
POWERIN on Bottom Layer "Bottom Layer-No Net" (solid, pour order 82): 6938.98,-5905.51 6988.19,-5954.72 7037.4,-6003.94 7106.3,-6003.94 7194.88,-5915.35 7480.31,-5915.35 7509.84,-5944.88 7559.06,-5994.09 7559.06,-6328.74 7598.43,-6368.11 7667.32,-6368.11 7706.69,-6328.74 7706.69,-6318.9 7706.69,-4212.6 7588.58,-4094.49 7401.57,-3907.48 6791.34,-3907.48 6791.34,-4064.96 6751.97,-4064.96 6751.97,-4005.91 6683.07,-4005.91 6683.07,-4064.96 6564.96,-4064.96 6564.96,-4153.54 6889.76,-4153.54 6889.76,-3996.06 7057.09,-3996.06 7086.61,-4025.59 7106.3,-4045.28 7106.3,-4124.02 7145.67,-4124.02 7145.67,-4074.8 7234.25,-4124.02 7450.79,-4340.55 7450.79,-5629.92 7421.26,-5659.45 7155.51,-5659.45 7106.3,-5659.45 6938.98,-5826.77
NetFH1_1 on Bottom Layer "Bottom Layer-No Net" (solid, pour order 38): 4891.73,-2834.65 6062.99,-2834.65 6062.99,-2962.6 5757.87,-3267.72 5757.87,-3986.22 5177.17,-3986.22 5177.17,-3267.72 4891.73,-2982.28 4891.73,-2834.65
NetB1_1 on Bottom Layer "Bottom Layer-No Net" (solid, pour order 34): 6269.68,-3661.42 5826.77,-3661.42 5826.77,-3307.09 6072.83,-3061.02 6141.73,-2992.13 6141.73,-2834.65 6269.68,-2834.65
NetB2_1 on Bottom Layer "Bottom Layer-No Net" (solid, pour order 30): 4675.2,-3661.42 5118.11,-3661.42 5118.11,-3307.09 4872.05,-3061.02 4803.15,-2992.13 4803.15,-2834.65 4675.2,-2834.65
NetB1_2 on Bottom Layer "Bottom Layer-No Net" (solid, pour order 28): 7234.25,-2775.59 7234.25,-3080.71 7677.17,-3523.62 8513.78,-3523.62 8513.78,-3149.61 7844.49,-3149.61 7470.47,-2775.59 7234.25,-2775.59 7391.73,-2775.59
NetB3_2 on Bottom Layer "Bottom Layer-No Net" (solid, pour order 26): 7234.25,-1909.45 7234.25,-2214.57 7677.17,-2657.48 8513.78,-2657.48 8513.78,-2283.46 7844.49,-2283.46 7470.47,-1909.45 7234.25,-1909.45 7391.73,-1909.45
NetB5_2 on Bottom Layer "Bottom Layer-No Net" (solid, pour order 24): 7234.25,-1023.62 7234.25,-1328.74 7677.17,-1771.65 8513.78,-1771.65 8513.78,-1397.64 7844.49,-1397.64 7470.47,-1023.62 7234.25,-1023.62 7391.73,-1023.62
NetB3_1 on Bottom Layer "Bottom Layer-No Net" (solid, pour order 22): 7155.51,-2992.13 7155.51,-2687.01 6712.6,-2244.09 5767.72,-2244.09 5767.72,-2618.11 6545.28,-2618.11 6919.29,-2992.13 7155.51,-2992.13 6998.03,-2992.13
NetB5_1 on Bottom Layer "Bottom Layer-No Net" (solid, pour order 20): 7155.51,-2125.98 7155.51,-1820.87 6712.6,-1377.95 5767.72,-1377.95 5767.72,-1751.97 6545.28,-1751.97 6919.29,-2125.98 7155.51,-2125.98 6998.03,-2125.98
NetB8_1 on Bottom Layer "Bottom Layer-No Net" (solid, pour order 18): 7155.51,-1220.47 7155.51,-915.35 6712.6,-472.44 5767.72,-472.44 5767.72,-846.46 6545.28,-846.46 6919.29,-1220.47 7155.51,-1220.47 6998.03,-1220.47
NetB4_1 on Bottom Layer "Bottom Layer-No Net" (solid, pour order 12): 3789.37,-2992.13 3789.37,-2687.01 4232.28,-2244.09 5177.17,-2244.09 5177.17,-2618.11 4399.61,-2618.11 4025.59,-2992.13 3789.37,-2992.13 3946.85,-2992.13
NetB1_2 on Bottom Layer "Bottom Layer-No Net" (solid, pour order 10): 3690.94,-2775.59 3690.94,-3080.71 3248.03,-3523.62 2411.42,-3523.62 2411.42,-3149.61 3080.71,-3149.61 3454.72,-2775.59 3690.94,-2775.59 3533.46,-2775.59
NetB3_2 on Bottom Layer "Bottom Layer-No Net" (solid, pour order 8): 3690.94,-1909.45 3690.94,-2214.57 3248.03,-2657.48 2411.42,-2657.48 2411.42,-2283.46 3080.71,-2283.46 3454.72,-1909.45 3690.94,-1909.45 3533.46,-1909.45
NetB6_1 on Bottom Layer "Bottom Layer-No Net" (solid, pour order 6): 3789.37,-2125.98 3789.37,-1820.87 4232.28,-1377.95 5177.17,-1377.95 5177.17,-1751.97 4399.61,-1751.97 4025.59,-2125.98 3789.37,-2125.98 3946.85,-2125.98
NetB7_1 on Bottom Layer "Bottom Layer-No Net" (solid, pour order 4): 3789.37,-1220.47 3789.37,-915.35 4232.28,-472.44 5177.17,-472.44 5177.17,-846.46 4399.61,-846.46 4025.59,-1220.47 3789.37,-1220.47 3946.85,-1220.47
NetB5_2 on Bottom Layer "Bottom Layer-No Net" (solid, pour order 2): 3690.94,-1023.62 3690.94,-1328.74 3248.03,-1771.65 2411.42,-1771.65 2411.42,-1397.64 3080.71,-1397.64 3454.72,-1023.62 3690.94,-1023.62 3533.46,-1023.62
+BATT on Top Layer "Bottom Layer-No Net" (solid, pour order 114): 5433.07,-4517.72 5433.07,-4921.26 5521.65,-4921.26 5521.65,-4911.42 5620.08,-4812.99 5669.29,-4763.78 6289.37,-4763.78 6299.21,-4753.94 6299.21,-4694.88 6259.84,-4655.51 5757.87,-4655.51 5629.92,-4527.56 5600.39,-4498.03 5452.76,-4498.03 5433.07,-4517.72
NetC14_1 on Top Layer "Bottom Layer-No Net" (solid, pour order 112): 5935.04,-5698.82 6102.36,-5698.82 6122.05,-5718.5 6122.05,-5866.14 6181.1,-5925.2 6210.63,-5925.2 6328.74,-5925.2 6368.11,-5885.83 6515.75,-5738.19 6515.75,-5196.85 6535.43,-5177.17 6683.07,-5177.17 6712.6,-5206.69 6712.6,-5826.77 6496.06,-6043.31 6446.85,-6092.52 6053.15,-6092.52 5935.04,-5974.41
5V_REG on Top Layer "Bottom Layer-No Net" (solid, pour order 110): 6043.31,-5541.34 6043.31,-5639.76 6112.2,-5639.76 6190.94,-5718.5 6190.94,-5846.46 6220.47,-5875.98 6289.37,-5875.98 6309.06,-5856.3 6309.06,-5826.77 6309.06,-5669.29 6181.1,-5541.34 6043.31,-5541.34
NetD4_1 on Top Layer "Bottom Layer-No Net" (solid, pour order 108): 5757.87,-5561.02 5757.87,-5757.87 5728.35,-5787.4 5728.35,-5846.46 5728.35,-5856.3 5757.87,-5885.83 5797.24,-5885.83 5836.61,-5846.46 5846.46,-5836.61 5846.46,-5679.13 5885.83,-5639.76 5974.41,-5639.76 5984.25,-5639.76 6003.94,-5620.08 6003.94,-5561.02 5984.25,-5541.34 5777.56,-5541.34 5757.87,-5561.02
NetQ7_2 on Top Layer "Bottom Layer-No Net" (solid, pour order 106): 5590.55,-5492.13 5590.55,-5649.61 5639.76,-5649.61 5649.61,-5639.76 5649.61,-5580.71 5659.45,-5570.87 5718.5,-5570.87 5728.35,-5561.02 5728.35,-5531.5 5728.35,-5521.65 5718.5,-5511.81 5688.98,-5482.28 5600.39,-5482.28 5590.55,-5492.13
NetC14_1 on Top Layer "Bottom Layer-No Net" (solid, pour order 102): 6309.06,-4763.78 6377.95,-4763.78 6397.64,-4783.46 6397.64,-4803.15 6397.64,-4931.1 6542.31,-5075.77 6617.14,-5075.77 6617.14,-5134.83 6555.12,-5196.85 6515.75,-5196.85 6309.06,-4990.16 6309.06,-4763.78
NetC33_2 on Top Layer "Bottom Layer-No Net" (solid, pour order 100): 6722.44,-4822.83 6919.29,-4822.83 6919.29,-4970.47 6791.34,-4970.47 6722.44,-4901.57 6722.44,-4822.83
NetC22_2 on Top Layer "Bottom Layer-No Net" (solid, pour order 98): 6899.61,-4133.86 6958.66,-4133.86 6958.66,-4084.65 7017.72,-4025.59 7017.72,-4015.75 7007.87,-4005.91 6909.45,-4005.91 6899.61,-4015.75 6899.61,-4114.17 6909.45,-4124.02 6958.66,-4124.02
NetC14_1 on Top Layer "Bottom Layer-No Net" (solid, pour order 94): 7007.87,-4143.7 7027.56,-4143.7 7037.4,-4143.7 7096.46,-4202.76 7096.46,-4261.81 7106.3,-4271.65 7194.88,-4271.65 7224.41,-4271.65 7244.09,-4291.34 7244.09,-4419.29 7293.31,-4468.5 7332.68,-4468.5 7352.36,-4488.19 7352.36,-4557.09 7352.36,-4576.77 7332.68,-4596.46 7322.83,-4606.3 7145.67,-4606.3 7145.67,-5075.77 6617.14,-5075.77 6573.32,-5126.47 6525.59,-5174.2 6525.59,-5226.38 6525.59,-5324.8 6702.76,-5324.8 6702.76,-5226.38 7263.78,-5226.38 7263.78,-4980.31 7381.89,-4980.31 7381.89,-4635.83 7421.26,-4596.46 7440.94,-4596.46 7450.79,-4586.61 7450.79,-4507.87 7450.79,-4419.29 7421.26,-4389.76 7411.42,-4379.92 7342.52,-4379.92 7312.99,-4379.92 7303.15,-4370.08 7293.31,-4360.24 7293.31,-4212.6 7273.62,-4192.91 7253.94,-4192.91 7214.57,-4192.91 7076.77,-4045.28 7007.87,-4045.28
NetC30_2 on Top Layer "Bottom Layer-No Net" (solid, pour order 92): 6889.76,-4399.61 6889.76,-4429.13 6899.61,-4438.98 6909.45,-4448.82 7037.4,-4448.82 7037.4,-4773.62 7027.56,-4783.46 7027.56,-4970.47 7047.24,-4990.16 7135.83,-4990.16 7145.67,-4990.16 7145.67,-4803.15 7125.98,-4793.31 7125.98,-4606.3 7145.67,-4586.61 7175.2,-4586.61 7185.04,-4576.77 7185.04,-4448.82 7135.83,-4399.61
+BATT on Top Layer "Bottom Layer-No Net" (solid, pour order 90): 6210.63,-4704.72 6210.63,-4753.94 6220.47,-4763.78 6289.37,-4763.78 6299.21,-4753.94 6377.95,-4753.94 6407.48,-4783.46 6407.48,-4872.05 6496.06,-4960.63 6584.65,-4960.63 6624.02,-4921.26 6663.39,-4921.26 6673.23,-4911.42 6673.23,-4832.68 6653.54,-4812.99 6643.7,-4803.15 6486.22,-4803.15 6486.22,-4753.94 6437.01,-4704.72 6427.17,-4694.88 6220.47,-4694.88
VBATT on Top Layer "Bottom Layer-No Net" (solid, pour order 88): 5442.91,-6023.62 5442.91,-6328.74 5501.97,-6387.8 5787.4,-6387.8 5856.3,-6318.9 5856.3,-6279.53 5787.4,-6210.63 5639.76,-6210.63 5580.71,-6151.57 5561.02,-6131.89 5561.02,-6033.46 5531.5,-6003.94 5462.6,-6003.94
NetB1_2 on Top Layer "Bottom Layer-No Net" (solid, pour order 54): 2411.42,-2952.76 2411.42,-3478.72 3863.8,-3478.72 4232.28,-3110.24 6712.6,-3110.24 7263.78,-3661.42 8533.46,-3661.42 8533.46,-2952.76 7145.67,-2952.76 6801.18,-2608.26 4114.17,-2608.27 3769.68,-2952.76
NetB3_2 on Top Layer "Bottom Layer-No Net" (solid, pour order 52): 2411.42,-2086.61 2411.42,-2795.28 3346.46,-2795.28 3681.1,-2795.28 4232.28,-2244.09 6712.6,-2244.09 7263.78,-2795.28 8533.46,-2795.28 8533.46,-2086.61 7145.67,-2086.61 6811.02,-1751.96 4104.33,-1751.97 3769.68,-2086.61
NetB5_2 on Top Layer "Bottom Layer-No Net" (solid, pour order 50): 2411.42,-1220.47 2411.42,-1929.13 3346.46,-1929.13 3681.1,-1929.13 4232.28,-1377.95 6712.6,-1377.95 7263.78,-1929.13 8533.46,-1929.13 8533.46,-1220.47 7145.67,-1220.47 6771.65,-846.45 4143.7,-846.46 3769.68,-1220.47
-BATT on Top Layer "Bottom Layer-No Net" (solid, pour order 42): 2411.42,-314.96 2411.42,-1023.62 3346.46,-1023.62 3681.1,-1023.62 4232.28,-472.44 6712.6,-472.44 7263.78,-1023.62 8533.46,-1023.62 8533.46,-314.96 7106.3,-314.96 6840.55,-49.21 4192.91,-49.22 3927.17,-314.96
-BATT on Top Layer "Bottom Layer-No Net" (solid, pour order 56): 2923.23,-324.8 2923.23,-1023.62 2411.42,-1023.62 2037.4,-1397.64 1830.71,-1604.33 1830.71,-3503.94 2135.83,-3809.06 2165.35,-3838.58 3730.31,-3838.58 3799.21,-3838.58 3927.17,-3966.54 3976.38,-4015.75 3976.38,-4242.13 4074.8,-4340.55 4143.7,-4409.45 4714.57,-4409.45 4714.57,-4478.35 4596.46,-4478.35 4596.46,-4645.67 3690.94,-4645.67 3208.66,-4163.39 3110.24,-4163.39 2017.72,-4163.39 1594.49,-3740.16 1427.17,-3572.83 1427.17,-1003.94 2116.14,-314.96 2923.23,-314.96
NetC1_1 on Top Layer "Bottom Layer-No Net" (solid, pour order 58): 4911.42,-4399.61 4911.42,-4478.35 4931.1,-4498.03 5196.85,-4498.03 5196.85,-4350.39 5167.32,-4320.87 5167.32,-4291.34 5108.27,-4291.34 5088.58,-4311.02 5088.58,-4320.87 5088.58,-4379.92 5078.74,-4389.76 5068.9,-4389.76 4921.26,-4389.76
NetD1_1 on Top Layer "Bottom Layer-No Net" (solid, pour order 60): 5265.75,-4202.76 5098.43,-4202.76 5098.43,-4261.81 5265.75,-4261.81 5265.75,-4202.76 5255.91,-4202.76 5246.06,-4212.6
NetC11_1 on Top Layer "Bottom Layer-No Net" (solid, pour order 62): 4606.3,-4576.77 4606.3,-4655.51 4527.56,-4655.51 4527.56,-4753.94 4606.3,-4753.94 4606.3,-4675.2 4685.04,-4675.2 4704.72,-4694.88 4724.41,-4694.88 4724.41,-4616.14 4685.04,-4576.77
NetC11_2 on Top Layer "Bottom Layer-No Net" (solid, pour order 64): 4616.14,-4685.04 4616.14,-4852.36 4645.67,-4852.36 4744.09,-4753.94 4744.09,-4625.98 4724.41,-4625.98 4724.41,-4694.88 4714.57,-4704.72 4694.88,-4704.72 4675.2,-4685.04
NetC37_2 on Top Layer "Bottom Layer-No Net" (solid, pour order 66): 3956.69,-6141.73 3956.69,-6043.31 4005.91,-5994.09 4005.91,-5915.35 4015.75,-5905.51 4124.02,-5905.51 4133.86,-5915.35 4133.86,-5944.88 4153.54,-5964.57 4222.44,-5964.57 4242.13,-5984.25 4242.13,-6102.36 4192.91,-6151.57 3966.54,-6151.57
NetD6_1 on Top Layer "Bottom Layer-No Net" (solid, pour order 68): 3956.69,-6269.68 4370.08,-6269.68 4389.76,-6250 4389.76,-6112.2 4429.13,-6072.83 4429.13,-5994.09 4419.29,-5984.25 4370.08,-5984.25 4360.24,-5994.09 4360.24,-6082.68 4311.02,-6131.89 4271.65,-6171.26 3966.54,-6171.26 3956.69,-6181.1
5V_REG on Top Layer "Bottom Layer-No Net" (solid, pour order 70): 4409.45,-6259.84 4419.29,-6269.68 4547.24,-6269.68 4625.98,-6190.94 4625.98,-6033.46 4616.14,-6023.62 4557.09,-6023.62 4547.24,-6033.46 4409.45,-6171.26 4409.45,-6259.84
+BATT on Top Layer "Bottom Layer-No Net" (solid, pour order 74): 4163.39,-5964.57 4242.13,-5964.57 4242.13,-5787.4 4153.54,-5787.4 4153.54,-5964.57
5V_REG on Top Layer "Bottom Layer-No Net" (solid, pour order 78): 2381.89,-5895.67 2480.32,-5895.67 2480.32,-6023.62 2470.47,-6033.46 2381.89,-6033.46 2372.05,-6043.31 2372.05,-6082.68 2381.89,-6092.52 2470.47,-6092.52 2480.32,-6102.36 2480.32,-6112.2 2470.47,-6122.05 2362.2,-6122.05 2352.36,-6112.2 2342.52,-6102.36 2342.52,-5905.51 2352.36,-5895.67
VUSB_JETSON on Top Layer "Bottom Layer-No Net" (solid, pour order 80): 2027.56,-5974.41 2017.72,-5964.57 2017.72,-5846.46 2027.56,-5836.61 2116.14,-5836.61 2125.98,-5826.77 2125.98,-5797.24 2116.14,-5787.4 2017.72,-5787.4 2007.87,-5777.56 2007.87,-5748.03 2017.72,-5738.19 2145.67,-5738.19 2155.51,-5748.03 2155.51,-5964.57 2145.67,-5974.41 2027.56,-5974.41

## Keep-outs
Keep-Out Layer:
  the board outline again, w3.94

## Text inside footprints (layer, text, board x,y; h text height)
J1: Mechanical 2 "PCB Edge" at 2811.02,-6456.69 h16
J2: Mechanical 2 "PCB Edge" at 1669.29,-6476.38 h16